# EAGLE board 5V BUS v5 (1) (EAGLE 9.7.0)
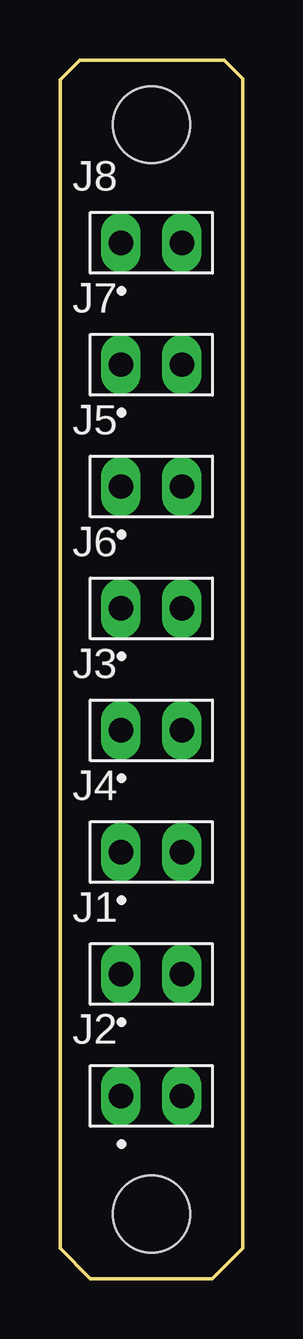
[diagram p0: board, top side]
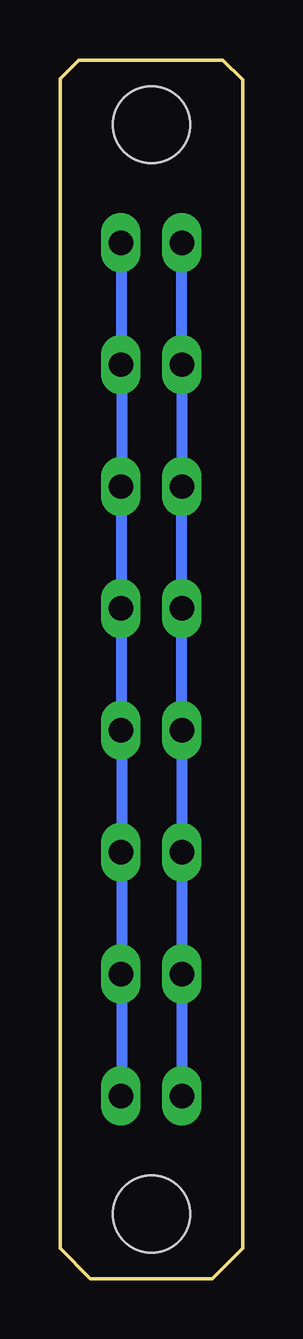
[diagram p1: board, bottom side, seen from below]

Size 7.62 x 50.8 mm. Coordinates in mm from the lower left corner, seen from the top.
Outline: 0,49.97 0,1.27 1.27,0 6.35,0 7.62,1.27 7.62,50.03 6.85,50.8 0.83,50.8 0,49.97
Copper layers (1*16): Top / Bottom
Stack-up Default Layer Stack: Top User Defined 0.035mm / Dielectric-1 User Defined 1.5mm / Bottom User Defined 0.035mm
Design rules "OthermillDRC_1_32_v2": minimum track width 8mil, minimum drill 0.8mm, track to track 0.794003125mm, track to pad 0.794003125mm, pad to pad 0.794003125mm, via to via 0.794003125mm, smd to smd 0mil, copper to edge 0mil, drill to drill 1mil, minimum pad ring 10mil, minimum via ring 10mil, stop-mask expansion 1mil, vias tented up to drill 30mil, thermal gap 10mil
Net classes: 0 default: width 0.457 mm, drill 1.016 mm
Holes 3.2 mm at 3.81,48.11 3.81,2.69

## Footprints (pad centres in the part's own frame; a part is rotated, then mirrored left to right if it is on the bottom)
61300211121 = drill 1.016 pad 1.651 long: 1 -1.27,0; 2 1.27,0

## Placement (x,y rotation side)
J1  61300211121  [61300211121]  3.81,12.7 0 top
J2  61300211121  [61300211121]  3.81,7.62 0 top
J3  61300211121  [61300211121]  3.81,22.86 0 top
J4  61300211121  [61300211121]  3.81,17.78 0 top
J5  61300211121  [61300211121]  3.81,33.02 0 top
J6  61300211121  [61300211121]  3.81,27.94 0 top
J7  61300211121  [61300211121]  3.81,38.1 0 top
J8  61300211121  [61300211121]  3.81,43.18 0 top

## Library data of the parts
J1-J8 = Aaron Electronics Library; CREATED_BY: PCBLayout.com; DIGI_KEY_PART_NUMBER: 732-5315-ND; MANUFACTURER: Wurth Electronics Inc.; MPN: 61300211121

## Nets
N$1: J1.2 J2.2 J3.2 J4.2 J5.2 J6.2 J7.2 J8.2
N$6: J1.1 J2.1 J3.1 J4.1 J5.1 J6.1 J7.1 J8.1

## Tracks (layer width: path | path; a pad name or v marks a point on that pad's centre or on a via)
N$1
  Bottom 0.457: J8.2 5.05,42.96 5.05,38.58 J7.2 5.05,37.95 5.05,33.58 J5.2 5.05,32.95 5.05,27.95 J6.2 5.05,27.32 5.05,22.94 J3.2 5.05,22.31 5.05,17.94 J4.2 5.05,17.31 5.05,12.93 J1.2 5.05,12.3 5.05,7.93 J2.2
N$6
  Bottom 0.457: J8.1 2.55,42.96 2.55,38.58 J7.1 2.55,37.95 2.55,33.58 J5.1 2.55,32.95 J6.1 2.55,27.32 2.55,22.94 J3.1 2.55,22.31 2.55,17.94 J4.1 2.55,17.31 2.55,12.93 J1.1 2.55,12.3 2.55,7.93 J2.1